# EAGLE board Rik 2114 (EAGLE 5.11)

Size 106.66 x 61.27 mm. Coordinates in mm from the lower left corner, seen from the top.
Outline: 0,0 106.66,0 106.66,61.27 0,61.27 0,0
Copper layers (1*16): Top 0.035mm / dielectric 1.5mm / Bottom 0.035mm
Design rules "default": minimum track width 10mil, minimum drill 24mil, track to track 8mil, track to pad 8mil, pad to pad 8mil, via to via 8mil, smd to smd 8mil, copper to edge 40mil, drill to drill 8mil, minimum pad ring 10mil, minimum via ring 8mil, stop-mask expansion 4mil, vias tented up to drill 0mil, thermal gap 10mil
Net classes: 1 Power: width 0.762 mm

## Footprints (pad centres in the part's own frame; a part is rotated, then mirrored left to right if it is on the bottom)
MKDSN1,5/2-5,08 = drill 1.3 pad 2 round: 1 -2.561,0.025; 2 2.519,0.025
6410-06 = drill 1.016 long: 1 6.35,0; 2 3.81,0; 3 1.27,0; 4 -1.27,0; 5 -3.81,0; 6 -6.35,0
C1206 = smd 1.6 x 1.8: 1 -1.4,0; 2 1.4,0
E2,5-7 = drill 0.813 pad 1.6 round: + -1.27,0 | drill 0.813 pad 1.6 octagon: - 1.27,0
D-5 = drill 0.813 octagon: A 2.54,0; C -2.54,0
G2R = drill 1.321 long: 1 -2.54,-3.683; 2 -2.54,3.81; O 13.97,-3.683; P 17.45,3.81; S 20.955,-3.683
GSH15 = drill 1.321 pad 2.54 long: 1 -7.62,0; 2 7.62,0 | hole 2.794: 0,0
TO220H = drill 1.118 long: 1 -2.54,-10.16; 2 0,-10.16; 3 2.54,-10.16 | hole 3.302: 0,4.826
14P = drill 0.813 long: 1 -7.62,3.81; 2 -7.62,-3.81; 3 -5.08,3.81; 4 -5.08,-3.81; 5 -2.54,3.81; 6 -2.54,-3.81; 7 0,3.81; 8 0,-3.81; 9 2.54,3.81; 10 2.54,-3.81; 11 5.08,3.81; 12 5.08,-3.81; 13 7.62,3.81; 14 7.62,-3.81
MA04-1 = drill 1.016 long: 1 -3.81,0; 2 -1.27,0; 3 1.27,0; 4 3.81,0
87832-06 = smd 1 x 2.75: 1 -2,-2.15; 2 -2,2.15; 3 0,-2.15; 4 0,2.15; 5 2,-2.15; 6 2,2.15 | hole 1: -1,0; 1,0
TO220BH = drill 1.118 long: D 0,-6.35; G -2.54,-6.35; S 2.54,-6.35 | hole 3.302: 0,11.176
M1206 = smd 1.6 x 2: 1 -1.4,0; 2 1.4,0
S64W = drill 0.813 long: A 2.54,1.27; E -2.54,1.27; S 0,1.27
22-23-2021 = drill 1 long: 1 -1.27,0; 2 1.27,0
SOT23 = smd 1 x 1.4: 1 -0.95,-1.1; 2 0.95,-1.1; 3 0,1.1
DIP20 = drill 0.8 long: P$1 -292.1,127; P$2 -292.1,124.46; P$3 -292.1,121.92; P$4 -292.1,119.38; P$5 -292.1,116.84; P$6 -292.1,114.3; P$7 -292.1,111.76; P$8 -292.1,109.22; P$9 -292.1,106.68; P$10 -292.1,104.14; P$11 -284.48,104.14; P$12 -284.48,106.68; P$13 -284.48,109.22; P$14 -284.48,111.76; P$15 -284.48,114.3; P$16 -284.48,116.84; P$17 -284.48,119.38; P$18 -284.48,121.92; P$19 -284.48,124.46; P$20 -284.48,127
SMKDSP_1,5/8 = drill 1.6 pad 1.8 long: 1 -2.5,0; 2 2.5,0; 3 7.5,0; 4 12.5,0; 5 17.5,0; 6 22.5,0; 7 27.5,0; 8 32.5,0

## Placement (x,y rotation side)
12V_INPUT  MKDSN1,5/2-5,08  [MKDSN1,5/2-5,08]  103.5,52.71 90 top
BUTTONS  22-27-2061-06  [6410-06]  5.08,27.94 90 top
C1  10uF  [C1206]  19.05,16.51 0 top
C2  100nF  [C1206]  19.05,24.13 0 top
C3  1000uF/16V  [E2,5-7]  62.86,18.41 0 top
C4  100nF  [C1206]  18.41,34.29 0 top
C5  100nF  [C1206]  18.41,29.21 0 top
C6  100nF  [C1206]  12.06,20.32 0 top
C7  10uF  [C1206]  12.06,16.51 0 top
C8  100nF  [C1206]  19.05,20.32 0 top
C9  10uF  [C1206]  18.41,41.28 180 top
D1  4849  [D-5]  67.31,45.72 0 top
EMI-SH-112D  G2R  [G2R]  64.13,36.2 0 top
F1  10A  [GSH15]  66.04,54.61 0 top
IC1  7805T  [TO220H]  86.36,57.79 0 top
LCD  Dil 10  [14P]  33.02,10.8 0 top
LEDS  [MA04-1]  5.71,45.09 90 top
PROGRAMING  87832-06  [87832-06]  33.66,54.61 0 top
Q1  IRF4905  [TO220BH]  81.91,19.68 90 top
Q2  IRF4905  [TO220BH]  81.91,6.99 90 top
R1  4.7K  [M1206]  50.8,26.67 0 top
R2  10K  [M1206]  12.06,34.29 0 top
R3  10K  [M1206]  12.06,29.21 0 top
R4  10K  [M1206]  12.06,24.13 0 top
R5  0.47K  [M1206]  12.7,41.28 0 top
R6  0.47K  [M1206]  12.7,46.36 0 top
R7  4.7K  [S64W]  49.53,11.43 90 top
R8  1K  [M1206]  56.52,8.25 0 top
R9  1K  [M1206]  56.52,4.45 0 top
R10  2.2K  [M1206]  71.12,10.8 0 top
R11  2.2K  [M1206]  71.75,3.17 180 top
R12  10K  [M1206]  50.8,22.86 180 top
START_BUTT  22-23-2021  [22-23-2021]  46.35,45.09 0 top
T1  BC849  [SOT23]  62.86,26.04 0 top
T2  BC849  [SOT23]  78.74,10.16 0 top
T3  BC849  [SOT23]  78.74,3.81 0 top
U$1  PIC16F1508_DIPDIP20  [DIP20]  321.95,-80.64 0 top
X2  SMKDSP_1,5/8  [SMKDSP_1,5/8]  102.23,10.16 90 top

## Library data of the parts
12V_INPUT = con-phoenix-508; MPN: MKDSN 1,5/2-5.08; OC_FARNELL: 1792903; OC_NEWARK: 30M2397
BUTTONS = con-molex; OC_FARNELL: unknown; OC_NEWARK: unknown
C1-C9 R1-R6 R8-R12 = resistor
D1 = diode
EMI-SH-112D = relay; OC_FARNELL: 1569185; OC_NEWARK: unknown
F1 = fuse; MPN: 64900001039; OC_FARNELL: 1271673; OC_NEWARK: 02P0318
IC1 = linear
LCD = con-dil
LEDS = con-lstb; OC_FARNELL: unknown; OC_NEWARK: unknown
PROGRAMING = con-molex; OC_FARNELL: 1756947; OC_NEWARK: unknown
Q1 Q2 = transistor-power
R7 = pot
START_BUTT = con-molex; MF: MOLEX; MPN: 22-23-2021; OC_FARNELL: 1462926; OC_NEWARK: 25C3832
T1-T3 = transistor
U$1 = PIC
X2 = con-phoenix-smkdsp; MF: FARNELL; MPN: 1733635; OC_FARNELL: 3041281; OC_NEWARK: 71C4133

## Nets
+12V [Power]: 12V_INPUT.2 F1.2
CLK: PROGRAMING.3 U$1.P$18
D4: LCD.6 U$1.P$14
D5: LCD.7 U$1.P$13
D6: LCD.8 U$1.P$12
D7: LCD.9 U$1.P$11
E: LCD.5 U$1.P$15
GND: 12V_INPUT.1 BUTTONS.2 BUTTONS.4 BUTTONS.6 C1.2 C2.2 C3.- C4.2 C5.2 C6.2 C7.2 C8.2 C9.2 IC1.2 LCD.1 PROGRAMING.5 R7.A R12.2 T1.2 T2.2 T3.2 U$1.P$20 X2.2 X2.4 X2.6 X2.8
LCD_DISPLAY: LCD.3 R7.S
LED1: LEDS.1 R5.2
LED2: LEDS.3 R6.2
MCLR: PROGRAMING.2 U$1.P$4
N$1: D1.A START_BUTT.1
N$3 [Power]: Q2.D X2.3 X2.7
N$6: BUTTONS.1 C4.1 R2.1 U$1.P$2
N$7: BUTTONS.3 C5.1 R3.1 U$1.P$3
N$8: BUTTONS.5 C6.1 R4.1 U$1.P$5
N$9: R5.1 U$1.P$7
N$10: R6.1 U$1.P$6
N$11: EMI-SH-112D.1 EMI-SH-112D.S F1.1 START_BUTT.2
N$12: EMI-SH-112D.2 T1.3
N$15: R1.2 R12.1 T1.1
N$17: Q1.G R8.2 T2.3
N$18: Q2.G R9.2 T3.3
N$22: R10.1 T2.1
N$24: R11.1 T3.1
OUTPUTS [Power]: Q1.D X2.1 X2.5
PGD: PROGRAMING.4 U$1.P$19
POW_REG: C7.1 D1.C IC1.1
RELAY: R1.1 U$1.P$8
RW: LCD.4 U$1.P$16
T1: R10.2 U$1.P$9
T2: R11.2 U$1.P$10
VCC+12: C3.+ EMI-SH-112D.P Q1.S Q2.S R8.1 R9.1
VDD: C1.1 C2.1 C8.1 C9.1 IC1.3 LCD.2 LEDS.2 LEDS.4 PROGRAMING.1 R2.2 R3.2 R4.2 R7.E U$1.P$1

## Tracks (layer width: path | path; a pad name or v marks a point on that pad's centre or on a via)
+12V  (1 unrouted)
CLK  (1 unrouted)
D4  (1 unrouted)
D5  (1 unrouted)
D6  (1 unrouted)
D7  (1 unrouted)
E  (1 unrouted)
GND  (25 unrouted)
LCD_DISPLAY  (1 unrouted)
LED1  (1 unrouted)
LED2  (1 unrouted)
MCLR  (1 unrouted)
N$1  (1 unrouted)
N$3  (2 unrouted)
N$6  (3 unrouted)
N$7  (3 unrouted)
N$8  (3 unrouted)
N$9  (1 unrouted)
N$10  (1 unrouted)
N$11  (3 unrouted)
N$12  (1 unrouted)
N$15  (2 unrouted)
N$17  (2 unrouted)
N$18  (2 unrouted)
N$22  (1 unrouted)
N$24  (1 unrouted)
OUTPUTS  (2 unrouted)
PGD  (1 unrouted)
POW_REG  (2 unrouted)
RELAY  (1 unrouted)
RW  (1 unrouted)
T1  (1 unrouted)
T2  (1 unrouted)
VCC+12  (5 unrouted)
VDD  (13 unrouted)